# Altium PCB main.PcbDoc
Units mil, origin at the board's own origin, x right, y up, seen from the top; angles counter-clockwise.
Board outline 755.97 x 946.03 mil, 2 copper layers (Top Layer, Bottom Layer); 8 components, 8 nets, 33 pads, 2 vias.
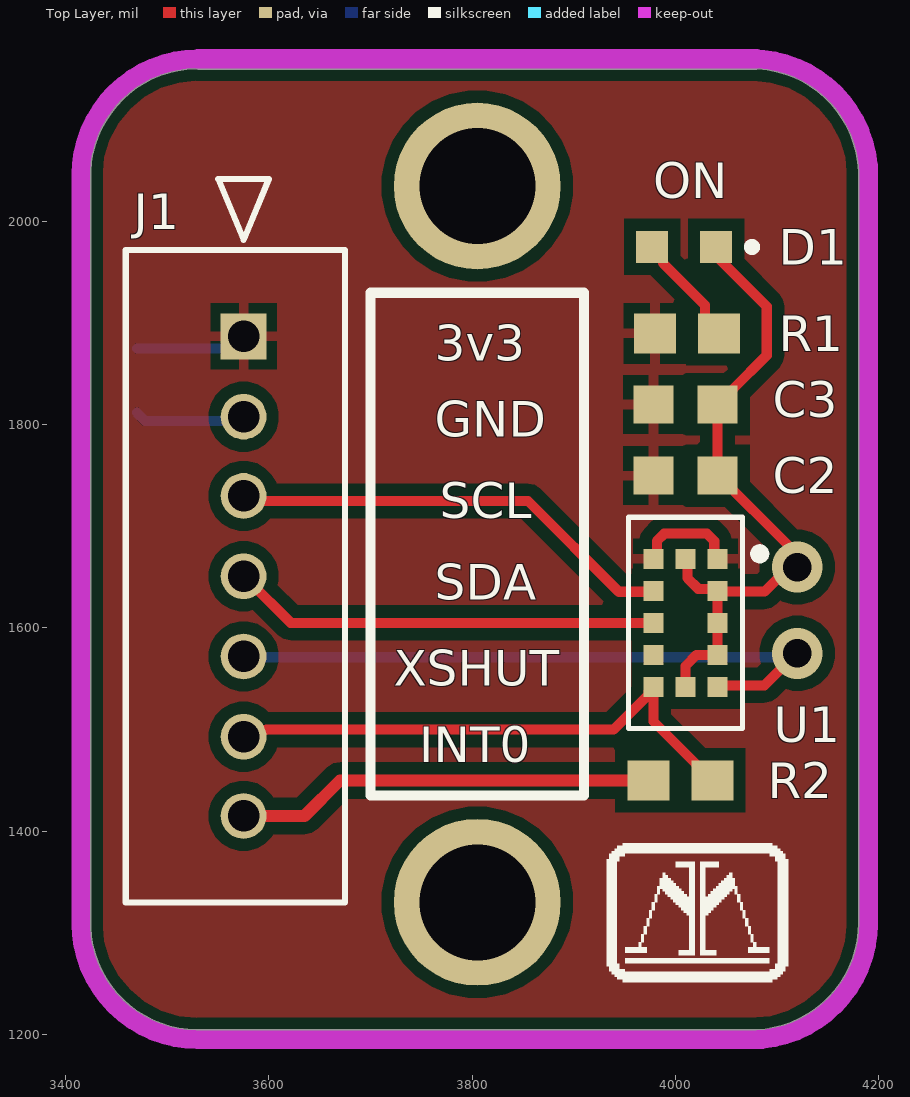
[diagram p0: Top Layer view]
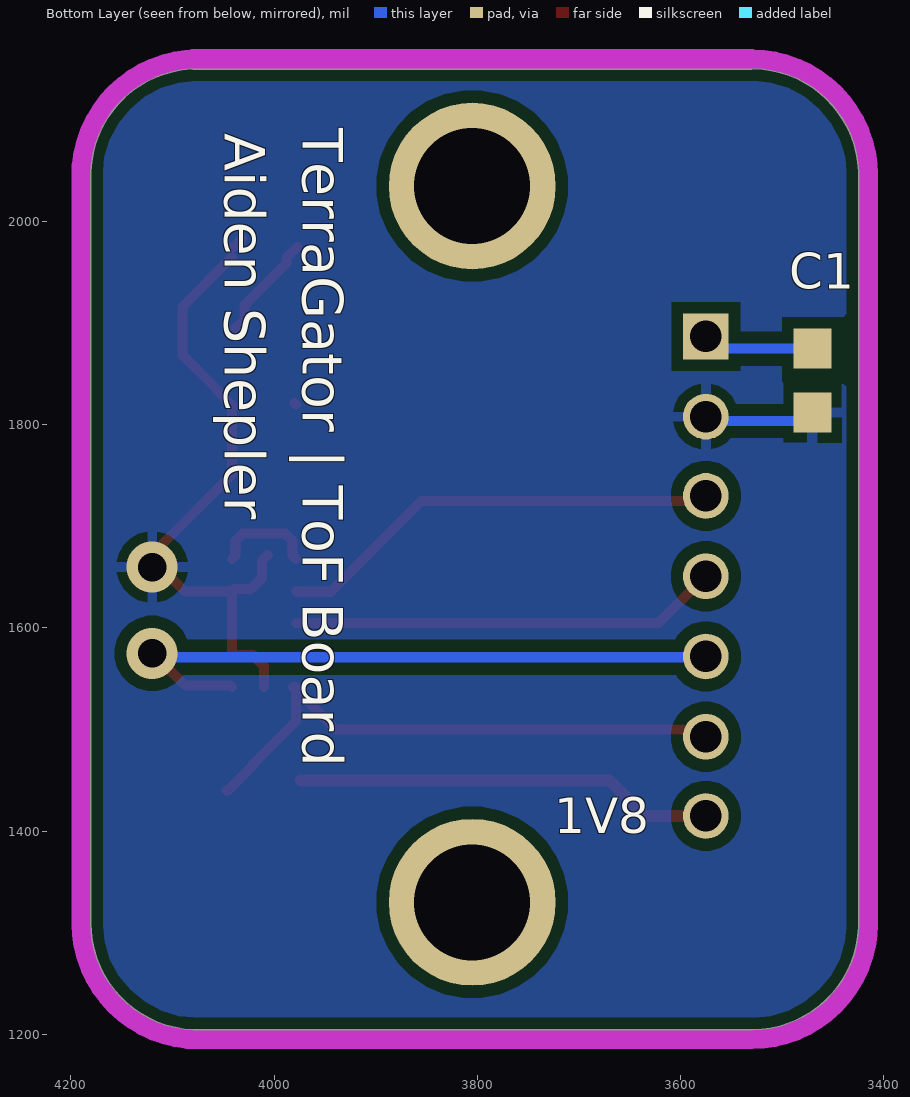
[diagram p1: Bottom Layer view, seen from below]

## Layer stack, top to bottom
Top Solder: solder mask 0.4, Solder Resist, Dk 3.5
Top Layer: signal copper 1.4
Dielectric 1: dielectric 12.6, FR-4, Dk 4.8
Bottom Layer: signal copper 1.4
Bottom Solder: solder mask 0.4, Solder Resist, Dk 3.5

## Board outline
4180.48,2049.68 ccw(c4075,2044.89) 4081.62,2150.28 4080,2150.14 3530,2150.14 3527.53,2150.46 ccw(c3530,2044.89) 3424.51,2049.68 3424.51,1305.41 ccw(c3530,1310) 3528.68,1204.42 3530,1204.52 4079.68,1204.52 ccw(c4074.89,1310) 4180.48,1310

## Design rules (kind name [scope] priority, off if disabled: settings)
BoardOutlineClearance [All] p1: gap=7.87 ignorepadtopadclearanceinfootprint=FALSE
Clearance "inPolygon Clearance" [InPolygon] p1: gap=11.81 ignorepadtopadclearanceinfootprint=TRUE // this rule ensures that every net within a polygon of a different net has a set clearance from the poly
Clearance "Different Diff Pair" [All] p2: gap=7.87 ignorepadtopadclearanceinfootprint=TRUE
Clearance "Same Diff Pair" [All] p3: gap=3.94 ignorepadtopadclearanceinfootprint=TRUE
Clearance "Different Nets" [not InAnyDifferentialPair] p4: gap=11.81 ignorepadtopadclearanceinfootprint=TRUE except(3.94: Arc-SMDPad Arc-THPad Arc-Via Arc-Text Track-SMDPad Track-THPad Track-Via Track-Text SMDPad-Text THPad-Text Via-Text Fill-Text Poly-Text Region-Text Text-Text; 4.72: Arc-Arc Arc-Track Track-Track; 5.91: SMDPad-SMDPad SMDPad-THPad SMDPad-Via THPad-THPad THPad-Via Via-Via; 7.87: Arc-Hole Track-Hole SMDPad-Hole THPad-Hole Via-Hole Fill-Hole Poly-Hole Region-Hole Text-Hole)
Clearance "Same Net" [not InAnyDifferentialPair] p5: gap=0 ignorepadtopadclearanceinfootprint=TRUE except(3.94: THPad-Via; 7.09: Arc-Arc Arc-Track Track-Track)
ComponentClearance [All] p1: gap=4 collisioncheckmode=3 verticalgap=4 showdistances=TRUE
DiffPairsRouting "Ethernet Routing" [InDifferentialPairClass('Ethernet_Pairs')] p1: maxlimit=7.87 minlimit=7.87 mostfreqgap=7.87 toplayer_minwidth=9.84 toplayer_maxwidth=9.84 toplayer_prefwidth=9.84 bottomlayer_minwidth=9.84 bottomlayer_maxwidth=9.84 bottomlayer_prefwidth=9.84 impedanceprofiledriven=TRUE impedanceprofileid={6C839EF7-FC3E-46DE-8B8A-5992B6406308} maxuncoupledlength=500
DiffPairsRouting "USB Routing" [InDifferentialPairClass('USB_Pairs')] p2: maxlimit=4.99 minlimit=4.99 mostfreqgap=4.99 toplayer_minwidth=9.07 toplayer_maxwidth=9.07 toplayer_prefwidth=9.07 bottomlayer_minwidth=9.07 bottomlayer_maxwidth=9.07 bottomlayer_prefwidth=9.07 impedanceprofiledriven=TRUE impedanceprofileid={44F334F2-7DCA-476F-8978-DAF7B35AC101} maxuncoupledlength=500
DiffPairsRouting "CAN Routing" [InDifferentialPairClass('CAN_Pairs')] p3: maxlimit=19.68 minlimit=19.68 mostfreqgap=19.68 toplayer_minwidth=7.93 toplayer_maxwidth=7.93 toplayer_prefwidth=7.93 bottomlayer_minwidth=7.93 bottomlayer_maxwidth=7.93 bottomlayer_prefwidth=7.93 impedanceprofiledriven=TRUE impedanceprofileid={655150C0-0DB8-45A2-9C08-8742605C1D3F} maxuncoupledlength=500
Height [All] p1: minheight=0 maxheight=71497.94 prefheight=500
HoleSize [All] p1: absolutevalues=TRUE maxlimit=248.03 minlimit=11.81 maxpercent=80.000 minpercent=20.000
HoleToHoleClearance [All] p1: gap=9.84 allowstackedmicrovias=FALSE
Length [All] p1: maxlimit=1709.92 minlimit=0 usedelayunits=TRUE mindelay=0.000000 maxdelay=10000.000000
MatchedLengths "Diff Pair Matched Delays" [InDifferentialPairClass('Ethernet_Pairs') or InDifferentialPairClass('USB_Pairs') or InDifferentialPairClass('CAN_Pairs')] p1: tolerance=196.85 checknetsindiffpair=TRUE checkdiffpairvsdiffpair=FALSE checkxsignals=FALSE checkothers=FALSE usedelayunits=TRUE delaytolerance=100.000000
MinimumAnnularRing [All] p1: minimumring=7.87
MinimumSolderMaskSliver [All] p1: minsoldermaskwidth=0
PlaneClearance "Supply Net Clearance" [InNetClass('Supply_Nets')] p1: clearance=19.68
PlaneClearance "All Nets" [All] p2: clearance=11.81
PolygonConnect "Supply Nets" [InNetClass('Supply_Nets')] p1: connectstyle=Direct reliefconductorwidth=11.81 reliefentries=4 polygonreliefangle="90 Angle" airgapwidth=10
PolygonConnect General [All] p2: connectstyle=Relief reliefconductorwidth=10 reliefentries=4 polygonreliefangle="90 Angle" airgapwidth=10
RoutingVias [All] p1: holewidth=7.87 width=13.78 viastyle="Through Hole" minholewidth=5.91 minwidth=11.81 maxholewidth=248.03 maxwidth=257.87
SilkToSilkClearance [All] p1: silktosilkclearance=0
SilkToSolderMaskClearance [All] p1: minsilkscreentomaskgap=0 clearancetoexposedcopper=TRUE
SolderMaskExpansion [All] p1: expansion=2.95 istentingtop=FALSE
SupplyNets "Schematic Supply Nets_4" [InNet('1V8')] p1: voltage=0.000
SupplyNets "Schematic Supply Nets_2" [InNet('3V3')] p2: voltage=0.000
SupplyNets "Schematic Supply Nets_3" [InNet('GND')] p3: voltage=0.000
UnRoutedNet [All] p1: checkbadconnections=TRUE
Width [All] p1: maxlimit=3937.01 minlimit=3.94 preferedwidth=11.81
Width "nRF Width" [InNetClass('nRF Signal')] p2: maxlimit=14.94 minlimit=14.94 preferedwidth=14.94 impedanceprofiledriven=TRUE impedanceprofileid={F40AD8AA-2A64-4F02-A627-F394B910E812} minimp=50.000000 maximp=50.000000 favimp=50.000000 checkconnectedcopper=TRUE
20 further rules are at their usual default settings.

## Components (designator, comment, footprint, x,y, rotation, side; value= is the part's Value field where it differs from the comment)
C1 "Cap" CAPC0603 3470,1843.5 r270 bottom value=100nF
C2 "Cap" CAPC0603 4010,1750 r0 top value=100nF
C3 "Cap" CAPC0603 4010,1820 r0 top value=4.7uF
D1 "0603 LED" "0603 (LED)" 4008.5,1975 r180 top
J1 "MOLEX_SHERLOCK_1x7_CONN" CON_353620750 3575,1887 r90 top
R1 "Res" RES0603 4011.5,1890 r0 top value=220
R2 "Res" RES0603 4005,1450 r0 top value=10k
U1 "VL53L1CXV0FY/1" "LGA-12 (VL53L1CXV0FY/1)" 4010,1605 r0 top

## Footprints (in the part's own frame and the unit in brackets; to place one, negate y for a bottom-side part, rotate by r counter-clockwise, add the part's x,y. Pads: shape width x height; smd on the part's side, far side on the other; paste and mask are expansions set on the pad)
"0603 (LED)" [mm] "0603 package for LED"
  rect 0.8x0.8 smd: A(0.8,0) C(-0.8,0)
  silkscreen extent -1.8,-0.1 -1.6,0.1, body extent -0.8,-0.4 0.8,0.4, height 0.7
CAPC0603 [mm] "Chip Capacitor, 2-Leads, Body 1.60x0.80mm, IPC Medium Density"
  rect 1x0.95 smd: 1(-0.8,0) 2(0.8,0)
  body extent -0.88,-0.48 0.87,0.48, height 0.8
CON_353620750 [mil]
  rect 45x45 / inner round 45 / far side rect 45x45 hole 31: 1(0,0)
  round 45 hole 31: 2(-79,0) 3(-157,0) 4(-236,0) 5(-315,0) 6(-394,0) 7(-472,0)
  silkscreen extent -557,-100 155,116, body extent -556,-100 86,118, height 337
"LGA-12 (VL53L1CXV0FY/1)" [mm] "12 pin LGA for 4.9 x 2.5 x 1.56 mm package"
  rect 0.5x0.5 smd: 1(0.8,1.6) 2(0.8,0.8) 3(0.8,0) 4(0.8,-0.8) 5(0.8,-1.6) 6(0,-1.6) 7(-0.8,-1.6) 8(-0.8,-0.8) 9(-0.8,0) 10(-0.8,0.8) 11(-0.8,1.6) 12(0,1.6)
  silkscreen extent -1.42,-2.64 1.97,2.64, body extent -1.25,-2.45 1.25,2.45, height 1.6
RES0603 [mm] "Chip Resistor, 2-Leads, Body 1.60x0.80mm, IPC Medium Density"
  rect 1.05x1 smd: 1(-0.8,0) 2(0.8,0)
  body extent -0.88,-0.48 0.87,0.47, height 0.8

## Part data
C1 C2 C3: Supplier Part Number 1=1276-1000-1-ND, Supplier 1=Digi-Key
D1: "150060SS75000"
J1: "1x7 2mm pitch sherlock connector", Package=None, Availability=Unavailable, MP=353620750, Price=None
R1 R2: "SMD, RES0603", Supplier Part Number 1=RMCF0603JT10K0CT-ND, Supplier 1=Digi-Key
U1: "ToF Optical Sensor 157.480 (4m) I²C Output from STMelectronics", Package="LGA-12 STMicroelectronics", Availability="In Stock", Check_prices=https://www.snapeda.com/parts/VL53L1CXV0FY/1/STMicroelectronics/view-part/?ref=eda, MF=STMicroelectronics, MP=VL53L1CXV0FY/1, Price=None, Purchase-URL=https://pricing.snapeda.com/search/part/VL53L1CXV0FY/1/?ref=eda, SnapEDA_Link=https://www.snapeda.com/parts/VL53L1CXV0FY/1/STMicroelectronics/view-part/?ref=snap

## Free pads (board coordinates)
  round 164.17 hole 114.17: 1(3805,1330) 1(3805,2035)

## Via types
v1: diameter 50, hole 28, Top Layer to Bottom Layer, 2 vias

## Nets (pads, with @x,y where several pads share a name; then routed paths per layer and width w, separated by ;. In a path a pad name is that pad's centre, name@x,y a point inside that pad or via, vN(x,y) a via of type N, cw(c..) or ccw(c..) an arc to the next point about the centre after c; other vN are vias at no path point)
1V8: J1.7 R2.1 | length 413
  Top Layer w11.81: J1.7 3635,1415 3670,1450 R2.1
3V3: C1.1 C2.1 C3.1 J1.1 R1.1 U1.1 U1.11 | length 215.7
  Top Layer w10: J1.1@3560,1882.48 J1.1@3570,1882.48 ; U1.11 3981.75,1671.23 3981.75,1685.65 3988.93,1692.83 4031.07,1692.83 4038.25,1685.65 4038.25,1671.23 U1.1 ; C3.1 C3.1@3980,1821.5
  Bottom Layer w10: C1.1 3562.52,1875 J1.1@3570,1882.48
GND: C1.2 C2.2 C3.2 D1.C J1.2 U1.2 U1.3 U1.4 U1.6 U1.12 | length 761.7
  Top Layer w10: U1.12@4006.2,1671.79 U1.12 4011.98,1666.01 4011.98,1649.07 4022.58,1638.47 4039.52,1638.47 U1.2 ; U1.6 4010,1562.65 4020.86,1573.5 U1.4 U1.3 U1.2 ; D1.C@4031.75,1983.25 D1.C ; D1.C@4041.5,1965 4090,1916.5 4090,1868.5 4056.18,1834.69 4056.18,1833.7 4042.48,1820 C3.2 4041.5,1750.98 4112.35,1680.13 4112.35,1667.65 v1(4120,1660) 4111.94,1660 4087.68,1635.75 4046.34,1635.75 4045.59,1636.5 U1.2
  Bottom Layer w10: C1.2 3478.27,1803.74 J1.2@3570,1803.74
INT0: J1.6 R2.2 U1.7 | length 558.7
  Top Layer w10: J1.6 3581.7,1499.7 3597.2,1499.7 3597.5,1500 3939.06,1500 3973.66,1534.61 3973.66,1537.17 U1.7 ; U1.7@3981.06,1542.01 U1.7 ; R2.2@4046.59,1439.91 4045.61,1439.91 4020.83,1464.69 4020.83,1465.67 3978.5,1507.99 U1.7
NetD1_A: D1.A R1.2 | length 112.3
  Top Layer w10: D1.A 3987.76,1964.25 3987.76,1959.13 4029.16,1917.73 4029.16,1903.83 R1.2
SCL: J1.3 U1.10 | length 445.9
  Top Layer w10: J1.3@3570,1725 3855,1725 3944.37,1635.63 3977.64,1635.63 U1.10
SDA: J1.4 U1.9 | length 425.6
  Top Layer w10: J1.4@3570,1646.26 3580,1646.26 3621.26,1605 U1.9
XSHUT: J1.5 U1.5 | length 645.3
  Top Layer w10: U1.5 4042.99,1543.5 4087.68,1543.5 4119.18,1575 v1(4120,1575)
  Bottom Layer w10: J1.5@3570,1567.52 3573.74,1571.26 4116.26,1571.26 v1(4120,1575)
pads on no net: U1.8

## Polygon pours and split planes (outlines as drawn)
GND on Bottom Layer "GND" (solid, pour order 1): 4180.48,2049.68 ccw(c4075,2044.89) 4081.62,2150.28 4080,2150.14 3530,2150.14 3527.53,2150.46 ccw(c3530,2044.89) 3424.51,2049.68 3424.51,1305.41 ccw(c3530,1310) 3528.68,1204.42 3530,1204.52 4079.68,1204.52 ccw(c4074.89,1310) 4180.48,1310
3V3 on Top Layer "3v3" (solid, pour order 0): 4180.48,2049.68 ccw(c4075,2044.89) 4081.62,2150.28 4080,2150.14 3530,2150.14 3527.53,2150.46 ccw(c3530,2044.89) 3424.51,2049.68 3424.51,1305.41 ccw(c3530,1310) 3528.68,1204.42 3530,1204.52 4079.68,1204.52 ccw(c4074.89,1310) 4180.48,1310

## Keep-outs
Keep-Out Layer:
  lines w19: 3414.9,1310 ccw(c3530,1310) 3530,1194.9 ; 3414.89,2044.89 cw(c3530,2044.89) 3530,2160 ; 3415,1305 3415,2050 ; 3530,1195 4085,1195 ; 4074.89,1194.89 ccw(c4074.89,1310) 4190,1310 ; 4075,2160 cw(c4075,2044.89) 4190.11,2044.89 ; 4190,1305 4190,2055
  lines w19.68: 3530,2160 4080,2160

## Silkscreen, mask and mechanical layers (free items; w line width, h text height)
Top Overlay:
  drawing of 22 lines, arcs and shapes, not listed
  text "ON" at 3978,2023 h35
  text "3v3" at 3763,1863 h35
  text "GND" at 3763,1788 h35
  text "SCL" at 3768,1708 h35
  text "SDA" at 3763,1628 h35
  text "XSHUT" at 3723,1543 h35
  text "INT0" at 3748,1468 h35
Bottom Overlay:
  text "TerraGator | ToF Board" at 3972,2092 h40 r90
  text "Aiden Shepler" at 4048.67,2087 h40 r90
  text "1V8" at 3724.07,1397.86 h35